# Altium PCB T-Clock.PcbDoc
Units mil, origin at the board's own origin, x right, y up, seen from the top; angles counter-clockwise.
Board outline 1023.62 x 1023.62 mil, 2 copper layers (Top Layer, Bottom Layer); 30 components, 40 nets, 126 pads, 29 vias.
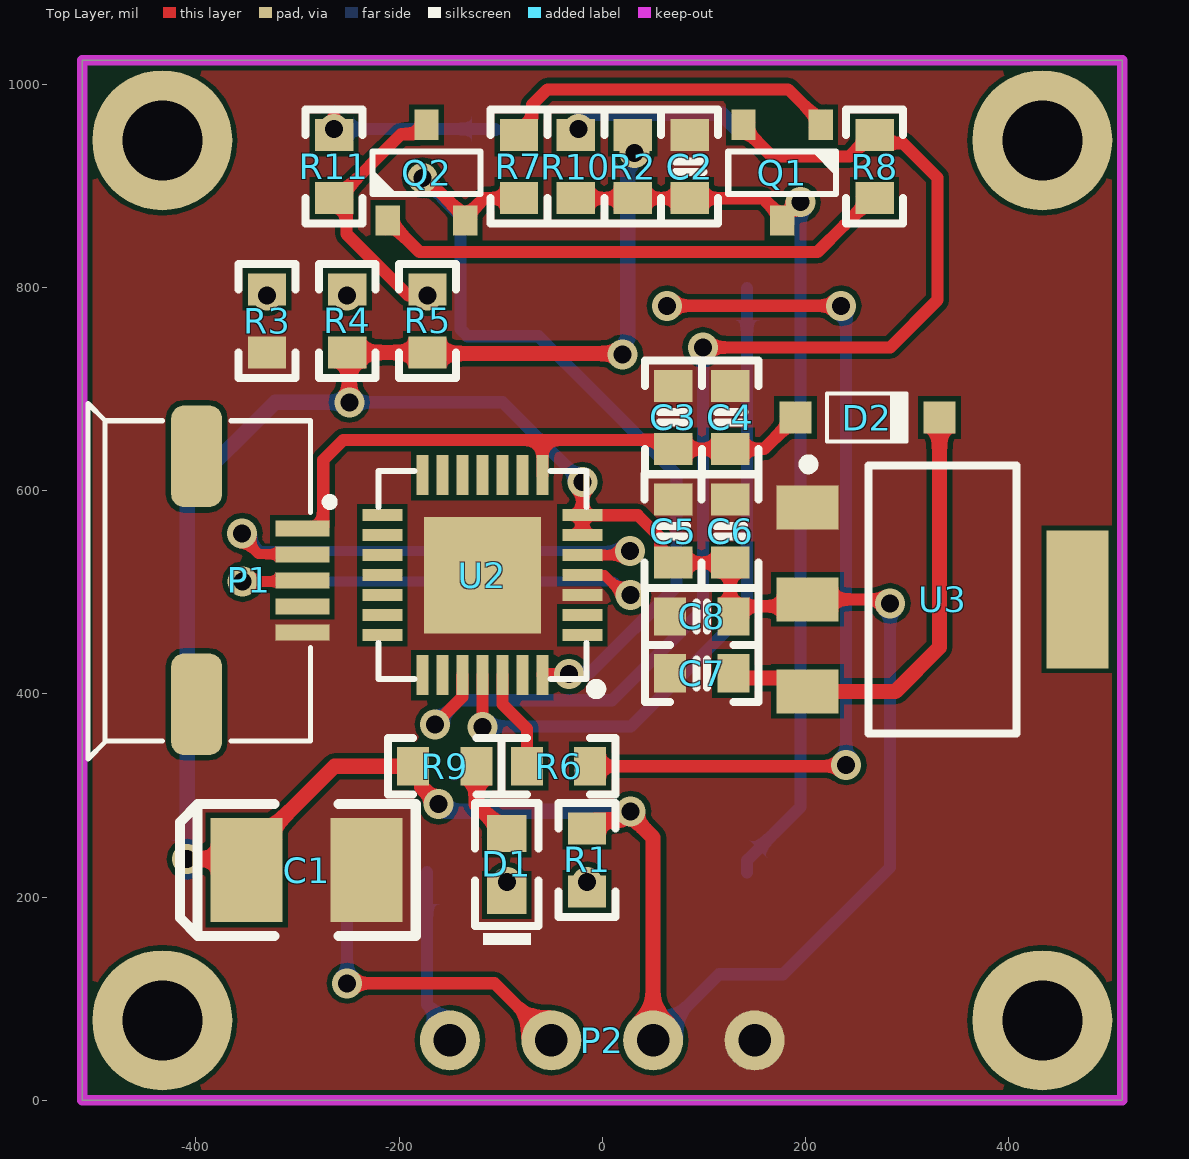
[diagram p0: Top Layer view]
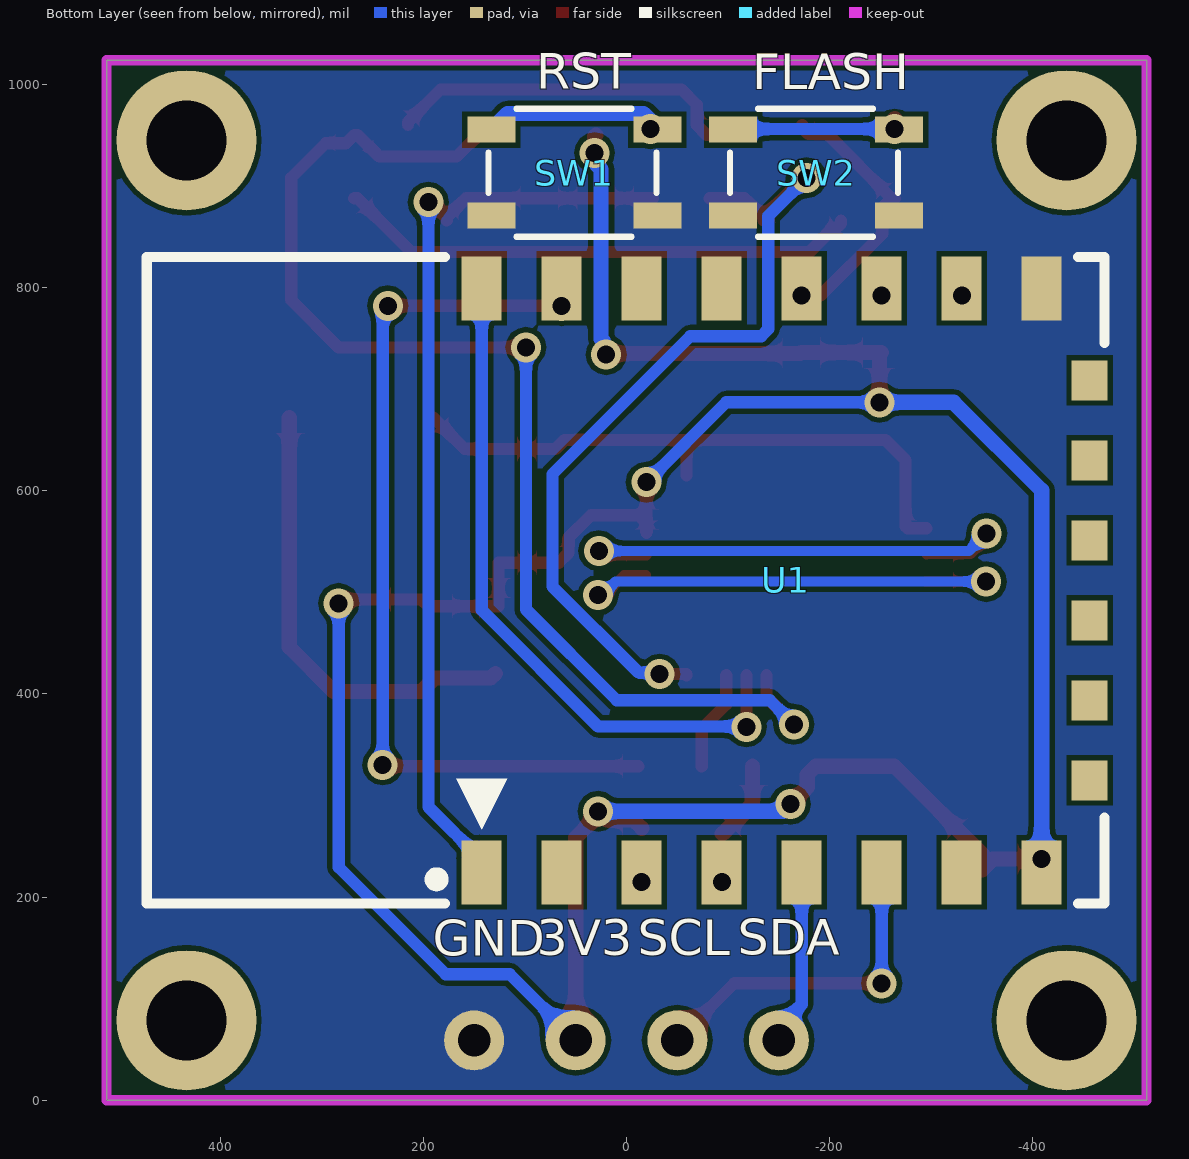
[diagram p1: Bottom Layer view, seen from below]
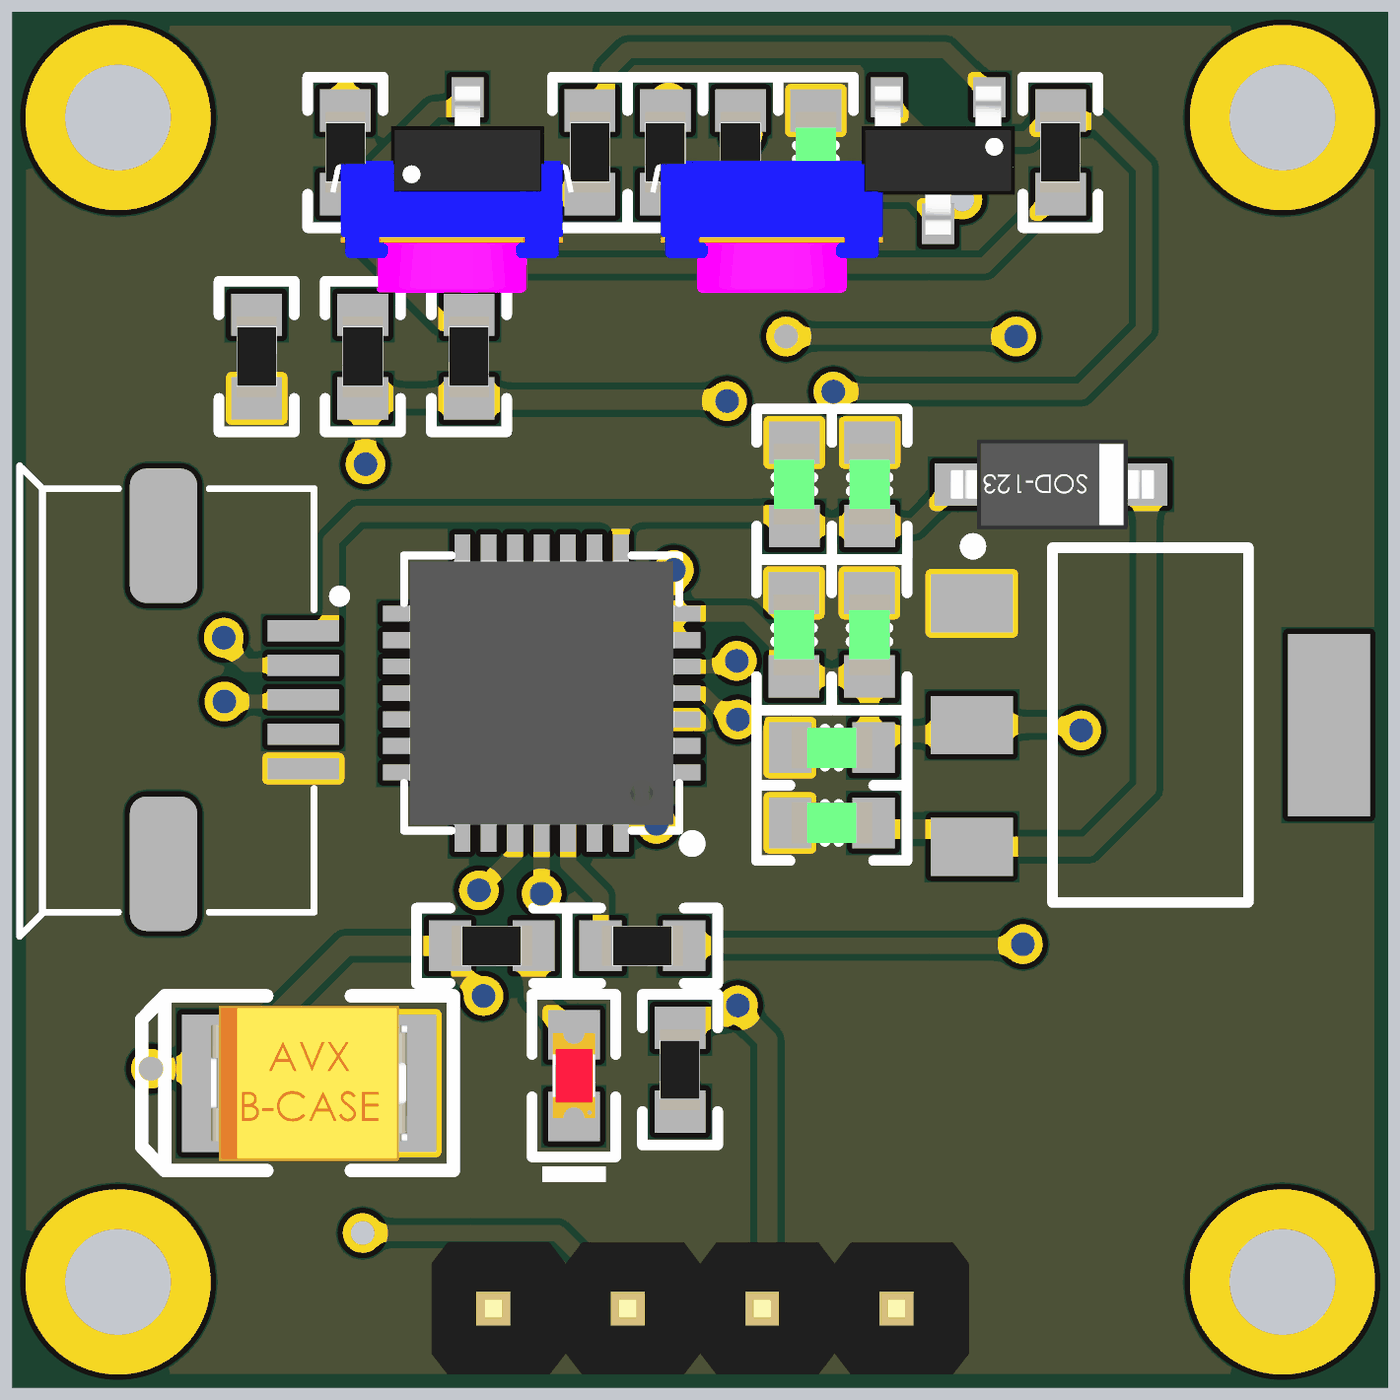
[diagram p2: 3D render of the assembled board from above, using the file's embedded part models]
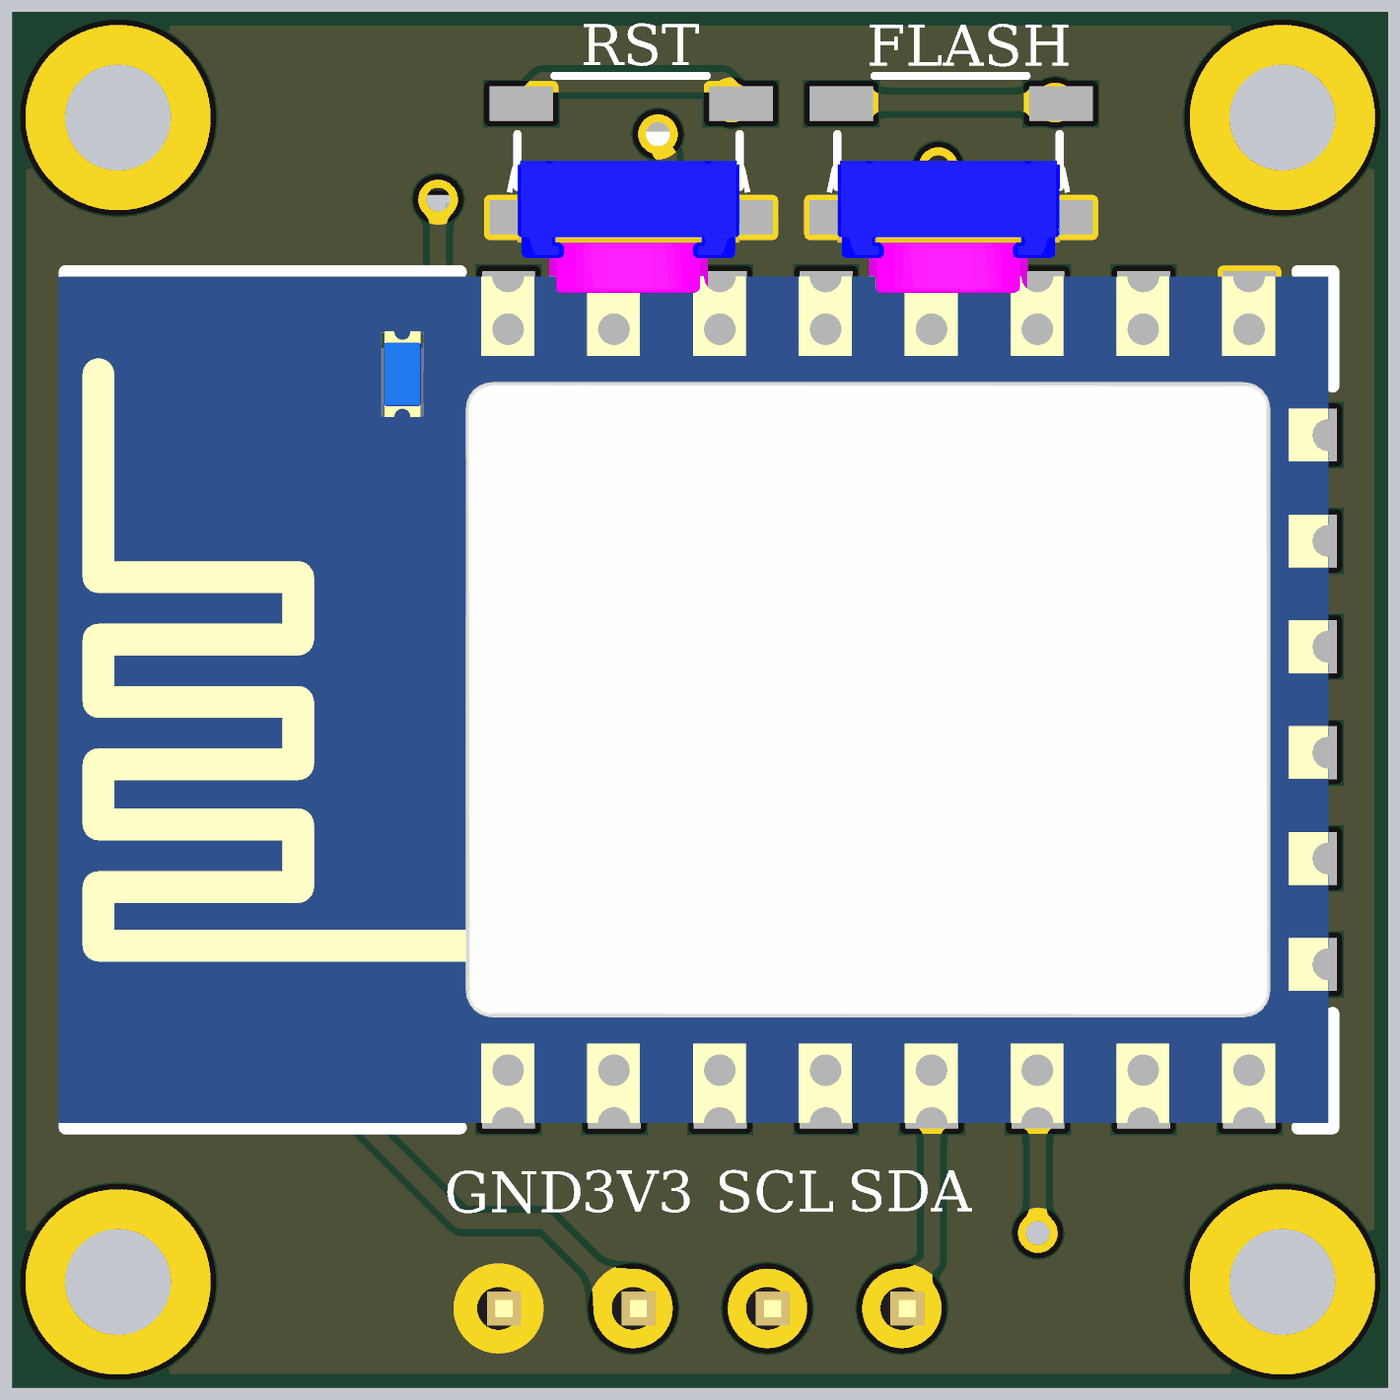
[diagram p3: 3D render of the assembled board from below, using the file's embedded part models]

## Layer stack, top to bottom
Top Solder: solder mask 0.4, Solder Resist, Dk 3.5
Top Layer: signal copper 1.4
Dielectric 1: dielectric 12.6, FR-4, Dk 4.8
Bottom Layer: signal copper 1.4
Bottom Solder: solder mask 0.4, Solder Resist, Dk 3.5

## Board outline
-511.81,0 -511.81,1023.62 511.81,1023.62 511.81,0

## Design rules (kind name [scope] priority, off if disabled: settings)
Clearance [All] p1: gap=5 ignorepadtopadclearanceinfootprint=TRUE
DiffPairsRouting [All] p1: maxlimit=10 minlimit=10 mostfreqgap=10 toplayer_minwidth=15 toplayer_maxwidth=15 toplayer_prefwidth=15 bottomlayer_minwidth=15 bottomlayer_maxwidth=15 bottomlayer_prefwidth=15 maxuncoupledlength=500
PlaneConnect [All] p1: planeconnectstyle=Direct reliefexpansion=20 reliefentries=4 reliefconductorwidth=10 reliefairgap=10
PolygonConnect [All] p1: connectstyle=Direct reliefconductorwidth=10 reliefentries=4 polygonreliefangle="90 Angle" airgapwidth=10
RoutingVias [All] p1: holewidth=17.72 width=29.53 viastyle="Through Hole" minholewidth=17.72 minwidth=29.53 maxholewidth=17.72 maxwidth=29.53
SolderMaskExpansion [All] p1: expansion=4 istentingtop=FALSE
Width [All] p1: maxlimit=50 minlimit=12 preferedwidth=12
28 further rules are at their usual default settings.

## Classes and differential pairs
component class U_Power: C7 C8 D2 U3
component class U_MCU: C1 C2 R1 R2 R3 R4 R5 U1
component class U_Dev: C3 C4 C5 C6 D1 P1 P2 Q1 Q2 R6 R7 R8 R9 R10 R11 SW1 SW2 U2
differential pair USB: +USB_P -USB_N

## Components (designator, comment, footprint, x,y, rotation, side; value= is the part's Value field where it differs from the comment)
C1 "100uF" CASE-B_3528 -291,226.61 r180 top
C2 "100nF" CAP-0603 86,919 r90 top
C3 "100nF" CAP-0603 70,672.1 r90 top
C4 "10uF" CAP-0603 126,672.1 r90 top
C5 "100nF" CAP-0603 69.77,560.2 r90 top
C6 "10uF" CAP-0603 125.87,560.2 r90 top
C7 "10uF" CAP-0603 97.87,420.19 r0 top
C8 "10uF" CAP-0603 97.87,476.19 r0 top
D1 "BLUE" LED_0603 -94,232.2 r90 top
D2 "SS14 6V" SOD_123 261,672 r180 top
P1 "USB_MICRO" MICROUSB-SOP -399.28,511.81 r90 top locked
P2 "HDR1x4_2.54" HDR1x4_2.54_180 -150,59.06 r90 top
Q1 "S8050" SOT-23-3 177,912.94 r90 top
Q2 "S8050" SOT-23-3 -173,912.94 r270 top
R1 "12K" R-0603 -15,236.63 r90 top
R2 "12K" R-0603 30,919 r90 top
R3 "12K" R-0603 -330,767.1 r270 top
R4 "12K" R-0603 -251,767.1 r270 top
R5 "12K" R-0603 -172,767.1 r270 top
R6 "470R" R-0603 -43,328.81 r0 top
R7 "1R" R-0603 -82,919 r270 top
R8 "1R" R-0603 268,919 r90 top
R9 "470R" R-0603 -155.05,328.81 r180 top
R10 "470R" R-0603 -26,919 r270 top
R11 "470R" R-0603 -264,919 r270 top
SW1 "KEY" KEY-4P-4.2*3.4*2.5 51.38,912.94 r180 bottom
SW2 "KEY" KEY-4P-4.2*3.4*2.5 -186.62,912.94 r180 bottom
U1 "ESP_12_E" ESP_12_E_L 142.57,196.84 r90 bottom locked
U2 "CP2102" QFN28 -118,516.81 r180 top locked
U3 "NCP1117ST33T3G" SOT-223 327.87,469 r270 top

## Footprints (in the part's own frame and the unit in brackets; to place one, negate y for a bottom-side part, rotate by r counter-clockwise, add the part's x,y. Pads: shape width x height; smd on the part's side, far side on the other; paste and mask are expansions set on the pad)
CAP-0603 [mm]
  rect 0.8x0.96 smd: 1(-0.79,0) 2(0.79,0)
  silkscreen extent -1.42,-0.71 1.42,0.71, body extent -0.76,-0.39 0.76,0.39, height 0.9
CASE-B_3528 [mm]
  rect 1.8x2.6 smd: 1(1.5,0) 2(-1.5,0)
  silkscreen extent -2.73,-1.65 3.16,1.65, body extent -1.85,-1.47 1.85,1.46, height 2.03
ESP_12_E_L [mm] "ESP-12 Wi-Fi Module by AI-Thinker"
  rect 1.6x1 smd: 1(0.7,0) 2(0.7,-2) 3(0.7,-4) 4(0.7,-6) 5(0.7,-8) 6(0.7,-10) 7(0.7,-12) 8(0.7,-14) 15(15.3,-14) 16(15.3,-12) 17(15.3,-10) 18(15.3,-8) 19(15.3,-6) 20(15.3,-4) 21(15.3,-2) 22(15.3,0)
  rect 1x0.9 smd: 9(3,-15.2) 10(5,-15.2) 11(7,-15.2) 12(9,-15.2) 13(11,-15.2) 14(13,-15.2)
  silkscreen extent -0.08,-15.57 16.08,8.37, body extent 0,-15.49 16,8.51, height 2.75
HDR1x4_2.54_180 [mm]
  round 1.5 hole 0.813: 1(0,0) 2(0,-2.54) 3(0,-5.08) 4(0,-7.62)
  body extent -1.25,-8.89 1.25,1.27, height 8.2
KEY-4P-4.2*3.4*2.5 [mm] "SKRPABE010"
  rect 1.2x0.65 smd: 1(-2.075,1.075) 1(2.075,1.075) 2(-2.075,-1.075) 2(2.075,-1.075)
  silkscreen extent -2.15,-1.6 2.05,1.6, body extent -2.35,-1.6 2.25,1.6, height 2.5
LED_0603 [mm]
  rect 0.93x0.98 smd: A(0.77,0) K(-0.77,0)
  silkscreen extent -2.01,-0.79 1.54,0.79, body extent -0.8,-0.4 0.8,0.4, height 0.6
MICROUSB-SOP [mm]
  rrect50% 2.54x1.27 smd: 0(-3.099,0) 0(3.099,0)
  rect 0.4x1.35 smd: 1(1.3,-2.642) 2(0.65,-2.642) 3(0,-2.642) 4(-0.65,-2.642) 5(-1.3,-2.642)
  silkscreen extent -4.47,-3.43 4.42,2.72
QFN28 [mm]
  rect 1x0.3 smd: 1(-2.5,1.5) 2(-2.5,1) 3(-2.5,0.5) 4(-2.5,0) 5(-2.5,-0.5) 6(-2.5,-1) 7(-2.5,-1.5) 15(2.5,-1.5) 16(2.5,-1) 17(2.5,-0.5) 18(2.5,0) 19(2.5,0.5) 20(2.5,1) 21(2.5,1.5)
  rect 0.3x1 smd: 8(-1.5,-2.5) 9(-1,-2.5) 10(-0.5,-2.5) 11(0,-2.5) 12(0.5,-2.5) 13(1,-2.5) 14(1.5,-2.5) 22(1.5,2.5) 23(1,2.5) 24(0.5,2.5) 25(0,2.5) 26(-0.5,2.5) 27(-1,2.5) 28(-1.5,2.5)
  rect 2.921x2.921 smd paste-3.2: 29(0,0)
  silkscreen extent -2.97,-2.6 2.6,2.97, body extent -2.5,-2.5 2.5,2.5, height 1
R-0603 [mm]
  rect 0.8x0.96 smd: 1(-0.79,0) 2(0.79,0)
  silkscreen extent -1.42,-0.71 1.42,0.71, body extent -0.76,-0.38 0.76,0.38, height 0.41
SOD_123 [mm]
  rect 0.8x0.8 smd: 1(1.8,0) 2(-1.8,0)
  silkscreen extent -1.02,-0.6 1.02,0.6, body extent -1.95,-0.85 1.9,0.85, height 1.42
SOT-23-3 [mil]
  rect 30x24 smd: 1(47,-38) 2(47,38) 3(-47,0)
  silkscreen extent -21,-53 21,53, body extent -55,-57 55,57, height 51
SOT-223 [mm]
  rect 1.1x1.55 smd: 1(-2.91,-3.197) 2(-0.61,-3.197) 3(1.69,-3.197)
  rect 3.45x1.55 smd: 4(-0.61,3.553)
  silkscreen extent -4.11,-3.3 2.74,2.03, body extent -3.88,-3.38 2.62,3.58, height 1.7

## Part data
C1: library part CAP-POL, "贴片电容-有极性", Package=3528, SuppliersPartNumber=C16133, ComponentLink1Description=供应商链接, ComponentLink1URL=http://www.szlcsc.com/product/details_16815.html, Supplier=LC
C2 C3 C4 C5 C6 C7 C8: library part CAP, "贴片电容", Package=0402, SuppliersPartNumber=C52923, ComponentLink1Description=供应商链接, ComponentLink1URL=http://www.szlcsc.com/product/details_53938.html, Supplier=LC
D1: library part LED, "发光二极管", Package=0603, SuppliersPartNumber=C2290, ComponentLink1Description=供应商链接, ComponentLink1URL=http://www.szlcsc.com/product/details_2663.html, Supplier=LC
D2: library part DIODE, "二极管", Package=SMA(DO-214AC), SuppliersPartNumber=C22452, ComponentLink1Description=供应商链接, ComponentLink1URL=http://www.szlcsc.com/product/details_23178.html, Supplier=LC
P1: "USB 接口"
P2: "Header"
Q1 Q2: library part BJT_NPN, "晶体管"
R1 R2 R3 R4 R5 R6 R7 R8 R9 R10 R11: library part RES, "贴片电阻", Package=0805, SuppliersPartNumber=C17798, Supplier=LC
SW1 SW2: "按键开关"
U1: "ESP-12 Wi-Fi Module by AI-Thinker", IC=ESP8266-EX, Vendor=Ai-thinker
U2: "USB to UART"
U3: library part NCP1117, "NCP1117, NCV1117. 1.0 A Low-Dropout Positive  Fixed and Adjustable  Voltage Regulators"

## Free pads (board coordinates)
  round 137.8 hole 78.74: 1(-433.07,78.74) 1(-433.07,944.88) 1(433.07,78.74) 1(433.07,944.88)

## Via types
v1: diameter 29.53, hole 17.72, Top Layer to Bottom Layer, 29 vias

## Nets (pads, with @x,y where several pads share a name; then routed paths per layer and width w, separated by ;. In a path a pad name is that pad's centre, name@x,y a point inside that pad or via, vN(x,y) a via of type N, cw(c..) or ccw(c..) an arc to the next point about the centre after c; other vN are vias at no path point)
3.3V: C1.1 C5.1 C6.1 C8.2 P2.3 R1.2 R2.2 R4.2 R5.2 R9.2 U1.8 U2.6 U2.7 U3.2 | length 3171.3
  Top Layer w12: U2.6@-19.58,558.4 U2.7 ; v1(-19.58,608.36) U2.7 ; v1(283.32,489) 279.32,493 U3.2 195.22,486.22 125.87,486.22 C6.1 66.62,529.09 57.07,538.65 57.07,553.8 35,575.87 U2.7
  Top Layer w15: v1(-408.61,237.39) -360.84,237.39 C1.1 -350.06,242.35 -263.6,328.81 R9.2 -177.9,320.56 -177.9,308.17 v1(-161.2,291.47) ; v1(-249,687) -249,734 R4.2 R5.2 -171,735 19,735 v1(20,734) ; R1.2 -6.75,275.98 19.51,275.98 v1(27.99,284.46) 27.99,280.53 50,258.52 P2.3 ; R2.2 31.5,948.61 v1(31.5,932.5)
  Bottom Layer w12: v1(-249,687) -98.22,687 v1(-19.58,608.36) ; P2.3 114.95,124 178,124 283.32,229.32 v1(283.32,489)
  Bottom Layer w15: U1.8 v1(-408.61,237.39) -408.61,600.39 -322,687 v1(-249,687) ; v1(-161.2,291.47) -154.19,284.46 v1(27.99,284.46) ; v1(20,734) 22.78,736.78 22.78,747.05 25,749.27 25,916.45 28.72,920.16 28.72,929.72 v1(31.5,932.5)
5V: C3.1 C4.1 D2.1 P1.1 U2.8 | length 611.1
  Top Layer w12: P1.1 -276.57,562.99 -274.7,564.87 -274.7,630.3 -255,650 -58.95,650 ; U2.8 -58.95,650 ; D2.1 159.13,641 C4.1 C3.1 61,650 -58.95,650
ACTIVE: U2.11
CTS: U2.23
DCD: U2.1
DSR: U2.27
DTR: Q2.2 R7.2 U2.28 | length 837.5
  Top Layer w12: v1(-177.06,908) -174.06,908 Q2.2@-135,868.94 ; Q2.2 Q2.2@-135,868.94 ; R7.2 -116.04,887.9 Q2.2@-135,868.94 ; U2.28 -58.95,419.36 -58.86,419.46 v1(-32.61,419.46)
  Bottom Layer w12: v1(-177.06,908) -139.55,870.49 -139.55,759.03 -132.52,752 -62.81,752 73,616.19 73,505.7 -11.76,420.94 -31.13,420.94 v1(-32.61,419.46)
GND: C1.2 C2.2 C3.2 C4.2 C5.2 C6.2 C7.1 C8.1 P1.5 P2.4 R3.2 SW1.2 SW2.2 U1.15 U2.3 U2.29 U3.1
NetC2_1: C2.1 Q1.3 R2.1 R10.2 U1.1 | length 919.3
  Top Layer w12: R10.2 R2.1 C2.1 158.04,887.9 Q1.3@177,868.94 ; Q1.3 Q1.3@177,868.94 ; v1(195,883.94) 192,883.94 Q1.3@177,868.94
  Bottom Layer w12: U1.1 142.57,236.21 195,288.64 v1(195,883.94)
NetC7_2: C7.2 D2.2 U3.3 | length 454.4
  Top Layer w15: C7.2 133.59,415.57 188.88,415.57 U3.3 288.45,402.45 331.87,445.87 D2.2
NetD1_A: D1.A R9.1 | length 79.3
  Top Layer w15: R9.1 -123.94,291.47 -94.98,262.51 D1.A
NetD1_K: D1.K U1.4 | length 13.3
  Top Layer w12: D1.K v1(-94,214.65)
  Bottom Layer w12: v1(-94,214.65) U1.4@-93.65,215
NetP2_1: P2.1 U1.5 | length 174.6
  Bottom Layer w12: U1.5 -172.39,94.18 -150,71.79 P2.1
NetP2_2: P2.2 U1.6 | length 333.6
  Top Layer w12: v1(-251.13,115.13) -106.07,115.13 P2.2
  Bottom Layer w12: v1(-251.13,115.13) U1.6
NetQ1_1: Q1.1 R7.1 | length 343.6
  Top Layer w12: R7.1 -78.85,950.1 -69.1,959.85 -69.1,979.9 -54,995 182.94,995 215,962.94 Q1.1
NetQ2_1: Q2.1 R8.1 | length 515.5
  Top Layer w12: Q2.1 -211,862.94 -205,856.94 -202,856.94 -180,834.94 211.89,834.94 238.13,861.18 264.85,887.9 R8.1
NetQ2_3: Q2.3 R5.1 R11.2 U1.18 | length 275.5
  Top Layer w12: R11.2 R11.2@-260.85,887.9 ; Q2.3 -173,956.94 -179,950.94 -197.81,950.94 R11.2@-260.85,887.9 ; R5.1 v1(-172,792) -191,792 -251.71,852.71 -251.71,878.76 R11.2@-260.85,887.9
  Bottom Layer w12: v1(-172,792) U1.18@-170,790
NetR1_1: R1.1 U1.3
  other v1: -14.91,215
NetR3_1: R3.1 U1.16
  other v1: -330,792
NetR4_1: R4.1 U1.17
  other v1: -251.13,792
NetR6_1: R6.1 U2.26 | length 99.6
  Top Layer w12: U2.26 -98.23,418.29 -98.23,389.83 -74.1,365.71 R6.1
NetR6_2: R6.2 U1.21 | length 877.6
  Top Layer w12: R6.2 238.81,328.81 v1(240,330) ; v1(63.83,782) v1(235,782)
  Bottom Layer w12: v1(235,782) 240,777 v1(240,330)
NetR10_1: R10.1 SW1.1 | length 166
  Bottom Layer w15: SW1.1@-23.47,964.43 -16.63,971.27 117.07,971.27 SW1.1@133.07,955.27
  other v1: -23.47,956
NetR11_1: R11.1 SW2.1 | length 169.5
  Top Layer w15: v1(-264,956) v1@-264,966.1
  Bottom Layer w12: v1(-264,956) -105.66,956 SW2.1@-104.93,955.27
NetU1_2: U1.2
NetU1_7: U1.7
NetU1_9: U1.9
NetU1_10: U1.10
NetU1_11: U1.11
NetU1_12: U1.12
NetU1_13: U1.13
NetU1_14: U1.14
NetU1_19: U1.19
NetU1_20: U1.20
NetU1_22: U1.22 U2.25 | length 675.8
  Top Layer w12: v1(-118.01,367.47) U2.25
  Bottom Layer w12: v1(-118.01,367.47) -117.49,367.99 27.99,367.99 142.57,482.57 U1.22
OTG_ID: P1.4
RI: U2.2
RTS: Q1.2 R8.2 U2.24 | length 1230.5
  Top Layer w12: v1(-164.62,370) -137.79,396.83 -137.79,418.29 U2.24 ; v1(99,741) 283.45,741 330,787.55 330,908 296,942 276.1,942 R8.2 264.85,950.1 243.69,928.94 167,928.94 139,956.94 Q1.2
  Bottom Layer w12: v1(-164.62,370) -140.92,393.69 9.69,393.69 99,483 v1(99,741)
USB_N: P1.2 U2.5 | length 534
  Top Layer w10: v1(-354.45,558) -358.84,558 -338.38,537.54 -295.41,537.54 P1.2 ; U2.5 23,536.5 v1(27.25,540.74) ; v1(27.25,540.74) 27.25,548.76 27.49,549 31.5,544.99 v1(27.25,540.74)
  Bottom Layer w10: v1(-354.45,558) -337.19,540.74 v1(27.25,540.74)
USB_P: P1.3 U2.4 | length 502.6
  Top Layer w10: v1(-354,510.54) P1.3@-294.41,510.54 ; U2.4@-19.29,516.81 2.19,516.81 21.87,497.13 v1(27.99,497.13)
  Bottom Layer w10: v1(-354,510.54) 10.65,510.54 24.06,497.13 v1(27.99,497.13)
pads on no net: P1.0 U2.9 U2.10 U2.12 U2.13 U2.14 U2.15 U2.16 U2.17 U2.18 U2.19 U2.20 U2.21 U2.22 U3.4

## Polygon pours and split planes (outlines as drawn)
GND on Top Layer "GND_L01_P003" (solid, remove dead copper, pour order 3): -630,1152 673,1152 793,1032 793,-340 -855,-340 -873,-322
no net on Top Layer "NONET_L01_P000" (solid, pour order 0): -46.38,583.55
GND on Bottom Layer "GND_L02_P002" (solid, remove dead copper, pour order 2): -602,1119 -593,1110 770,1110 770,-157 568,-359 489,-280 -646,-280

## Keep-outs
Keep-Out Layer:
  the board outline again, w10

## Silkscreen, mask and mechanical layers (free items; w line width, h text height)
Bottom Overlay:
  text "RST" at 89.05,983.9 h60
  text "FLASH" at -123.52,983.45 h60
  text "SDA" at -109.26,131.35 h60
  text "SCL" at -10.91,130.9 h60
  text "3V3" at 88.42,130.9 h60
  text "GND" at 190.52,130.45 h60
Mechanical 1:
  the board outline again, w10

## Text inside footprints (layer, text, board x,y; h text height)
U1: Mechanical 13 "CUTOUT POLYGON" at 430.57,255.84 h10 r270; Mechanical 13 "ANTENNA AREA" at 450.57,255.84 h10 r270